# EAGLE board bp_to_avr_revA (EAGLE 6.3)
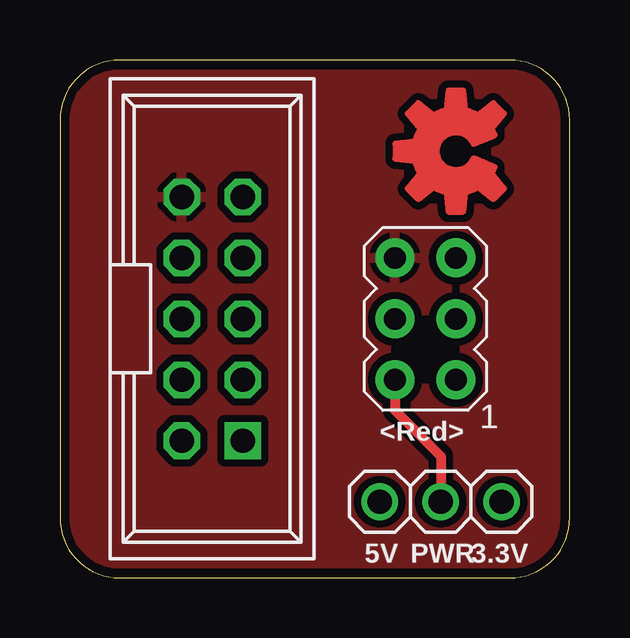
[diagram p0: board, top side]
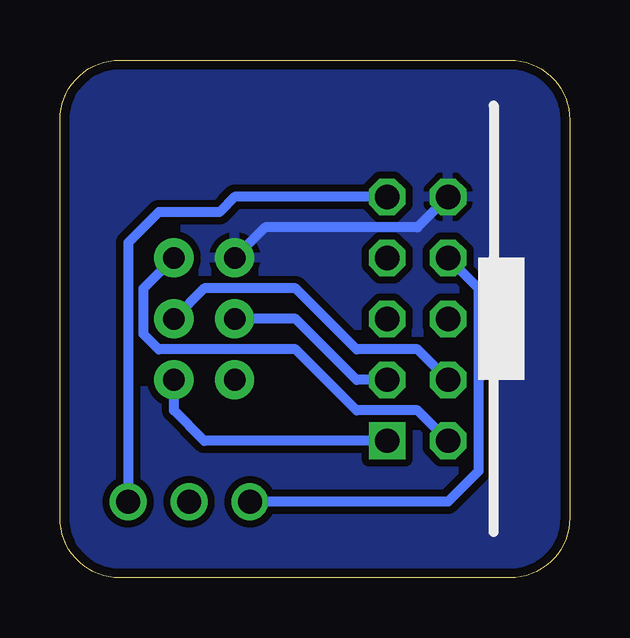
[diagram p1: board, bottom side, seen from below]

Size 21.26 x 21.58 mm. Coordinates in mm from the lower left corner, seen from the top.
Outline: 21.26,2.5 21.26,19.08 arc90 18.76,21.58 2.5,21.58 arc90 0,19.08 0,2.5 arc90 2.5,0 18.76,0 arc90 21.26,2.5
Copper layers (1*16): Top 0.0356mm / dielectric 1.5011mm / Bottom 0.0356mm
Design rules "LaenPCBOrder": minimum track width 6mil, minimum drill 13mil, track to track 6mil, track to pad 6mil, pad to pad 6mil, via to via 6mil, smd to smd 6mil, copper to edge 15mil, drill to drill 6mil, minimum pad ring 7mil, minimum via ring 7mil, stop-mask expansion 4mil, vias tented up to drill 0mil, thermal gap 10mil

## Footprints (pad centres in the part's own frame; a part is rotated, then mirrored left to right if it is on the bottom)
AVRISP = drill 0.9 pad 1.626: 1 -1.27,2.54; 2 1.27,2.54; 3 -1.27,0; 4 1.27,0; 5 -1.27,-2.54; 6 1.27,-2.54
PINSHRD_PTH_2X05B = drill 1.016 square: 1 -5.08,-1.27 | drill 1.016 octagon: 2 -5.08,1.27; 3 -2.54,-1.27; 4 -2.54,1.27; 5 0,-1.27; 6 0,1.27; 7 2.54,-1.27; 8 2.54,1.27; 9 5.08,-1.27; 10 5.08,1.27
1X03 = drill 1.016: 1 -2.54,0; 2 0,0; 3 2.54,0

## Placement (x,y rotation side)
ISP1  AVRISP-6  [AVRISP]  15.24,10.79 180 top
J1  CON_HEADER_2X05-PTH+SHROUDED_B  [PINSHRD_PTH_2X05B]  6.35,10.79 90 top
JP1  [1X03]  15.88,3.17 0 top
U$4  [ADAFRUIT_OSHWLOGO_TOP_0.2_NO_MASK]  16.51,17.78 90 top

## Library data of the parts
ISP1 JP1 = adafruit
J1 = dp_devices
U$4 = bp_to_avr

## Nets
3V3: J1.9 JP1.3
5V: J1.8 JP1.1
ADC: J1.7
AUX: J1.5
CLK: ISP1.3 J1.4
CS: ISP1.5 J1.2
GND: ISP1.6 J1.10
MISO: ISP1.1 J1.1
MOSI: ISP1.4 J1.3
PWRSEL: ISP1.2 JP1.2
VPU: J1.6

## Tracks (layer width: path | path; a pad name or v marks a point on that pad's centre or on a via)
3V3
  Bottom 0.406: J1.9 13.97,15.88 14.61,15.24 17.14,15.24 18.41,13.97 JP1.3
5V
  Bottom 0.406: J1.8 3.81,12.06 3.81,4.45 5.08,3.17 JP1.1
CLK
  Bottom 0.406: J1.4 6.35,9.53 8.89,9.53 11.43,12.06 15.24,12.06 ISP1.3
CS
  Bottom 0.406: J1.2 6.35,6.99 8.89,6.99 11.43,9.53 17.14,9.53 17.78,10.16 17.78,12.06 ISP1.5
GND
  Bottom 0.406: J1.10 6.35,14.61 12.7,14.61 ISP1.6
  pour Top (isolate 0.305): 0,22.22 0,-0.64 21.59,-0.64 21.59,22.22
  pour Bottom (isolate 0.305): 0,22.22 0,-0.64 21.59,-0.64 21.59,22.22
MISO
  Bottom 0.406: J1.1 15.24,5.71 16.51,6.99 ISP1.1
MOSI
  Bottom 0.406: J1.3 8.89,8.26 11.43,10.79 ISP1.4
PWRSEL
  Top 0.406: ISP1.2 13.97,6.99 15.88,5.08 JP1.2

## Text on the board
tStop: Avrrrinator Rev. A | Bus Pirate v3 | AVR ISP
bStop: Bus Pirate v3 ISP / adapter / 2014-2-18 | open.konspyre.org/avra
_tsilk: <Red> | 5V | PWR | 3.3V